# EAGLE board RedBot-Panel-v11 (EAGLE 6.4)
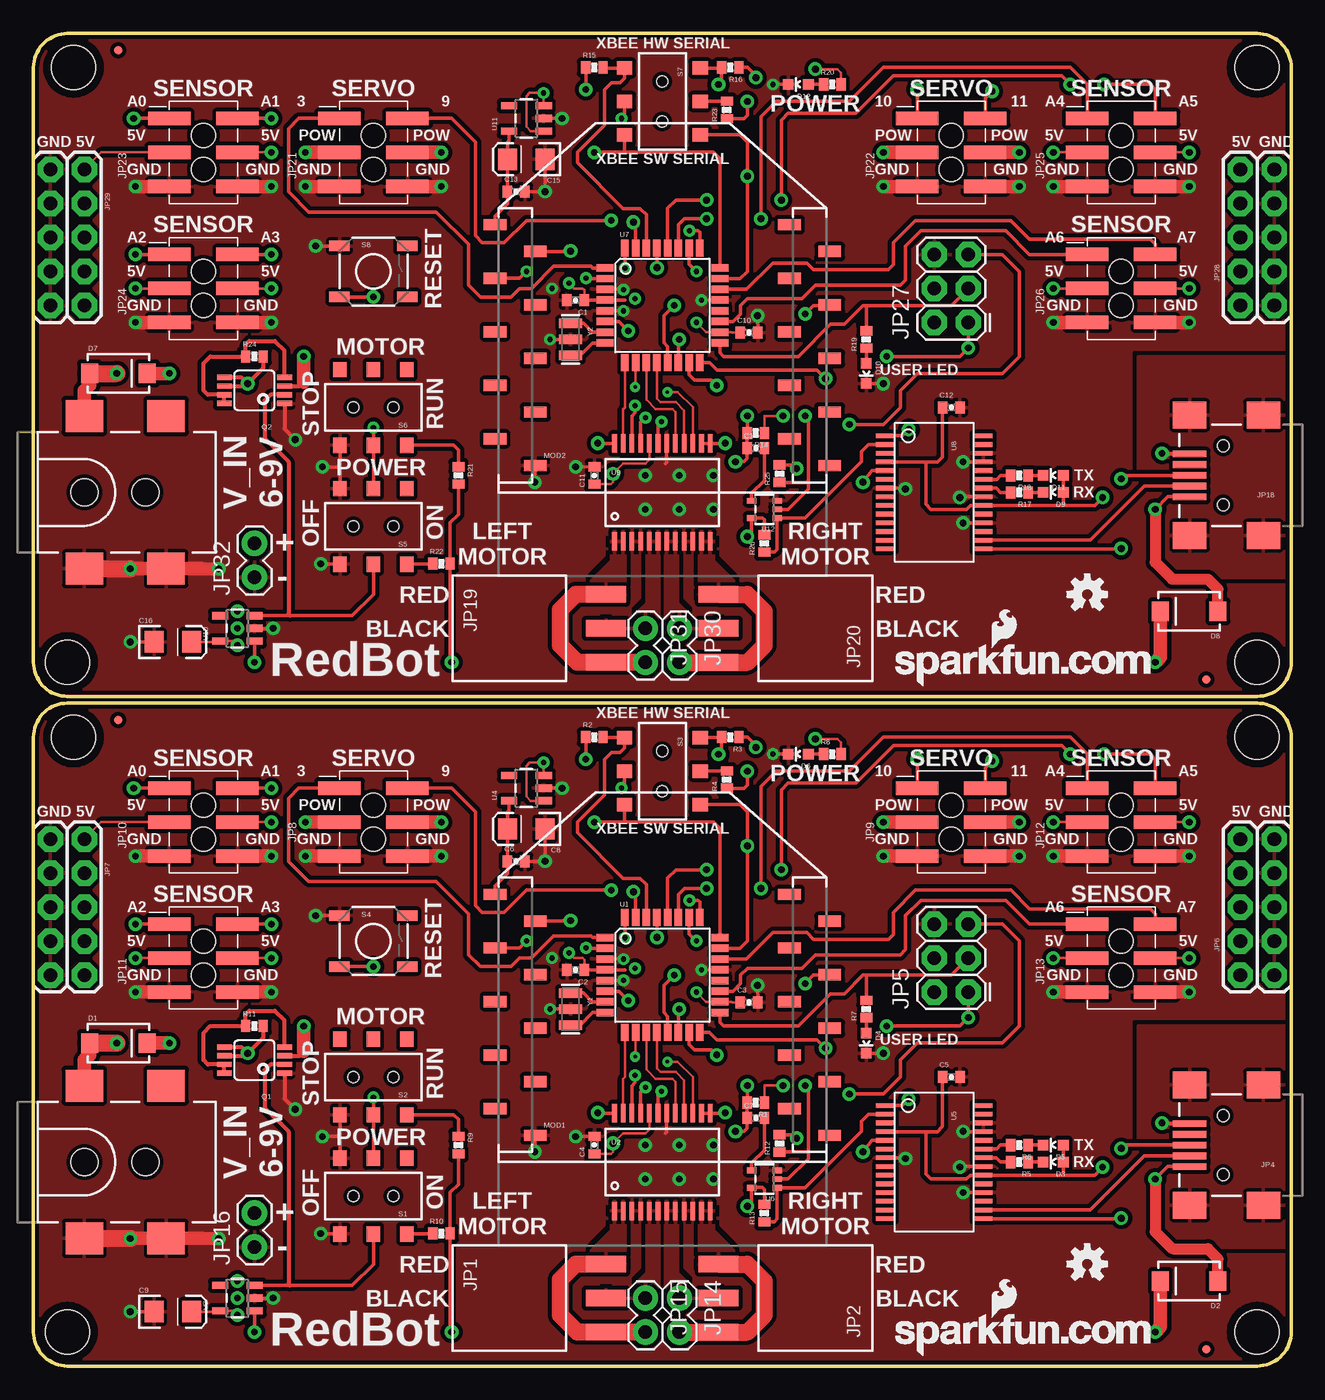
[diagram p0: board, top side]
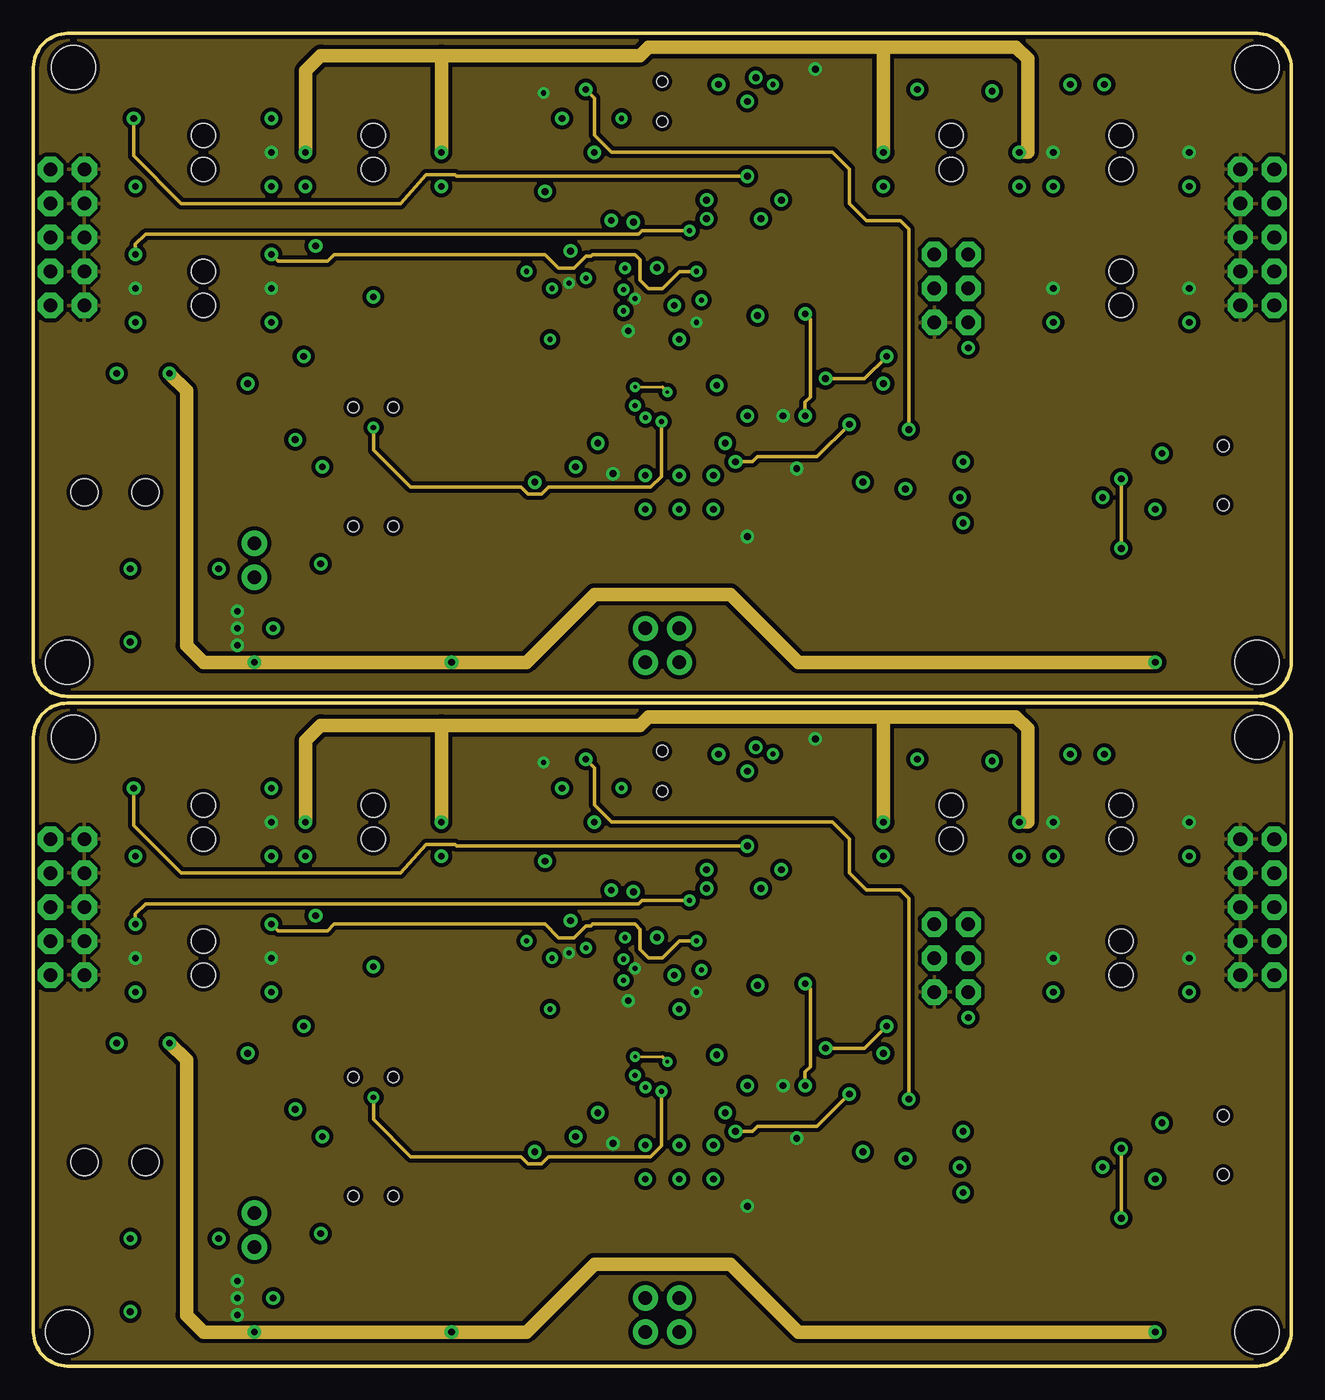
[diagram p1: board, inner layer 5V]
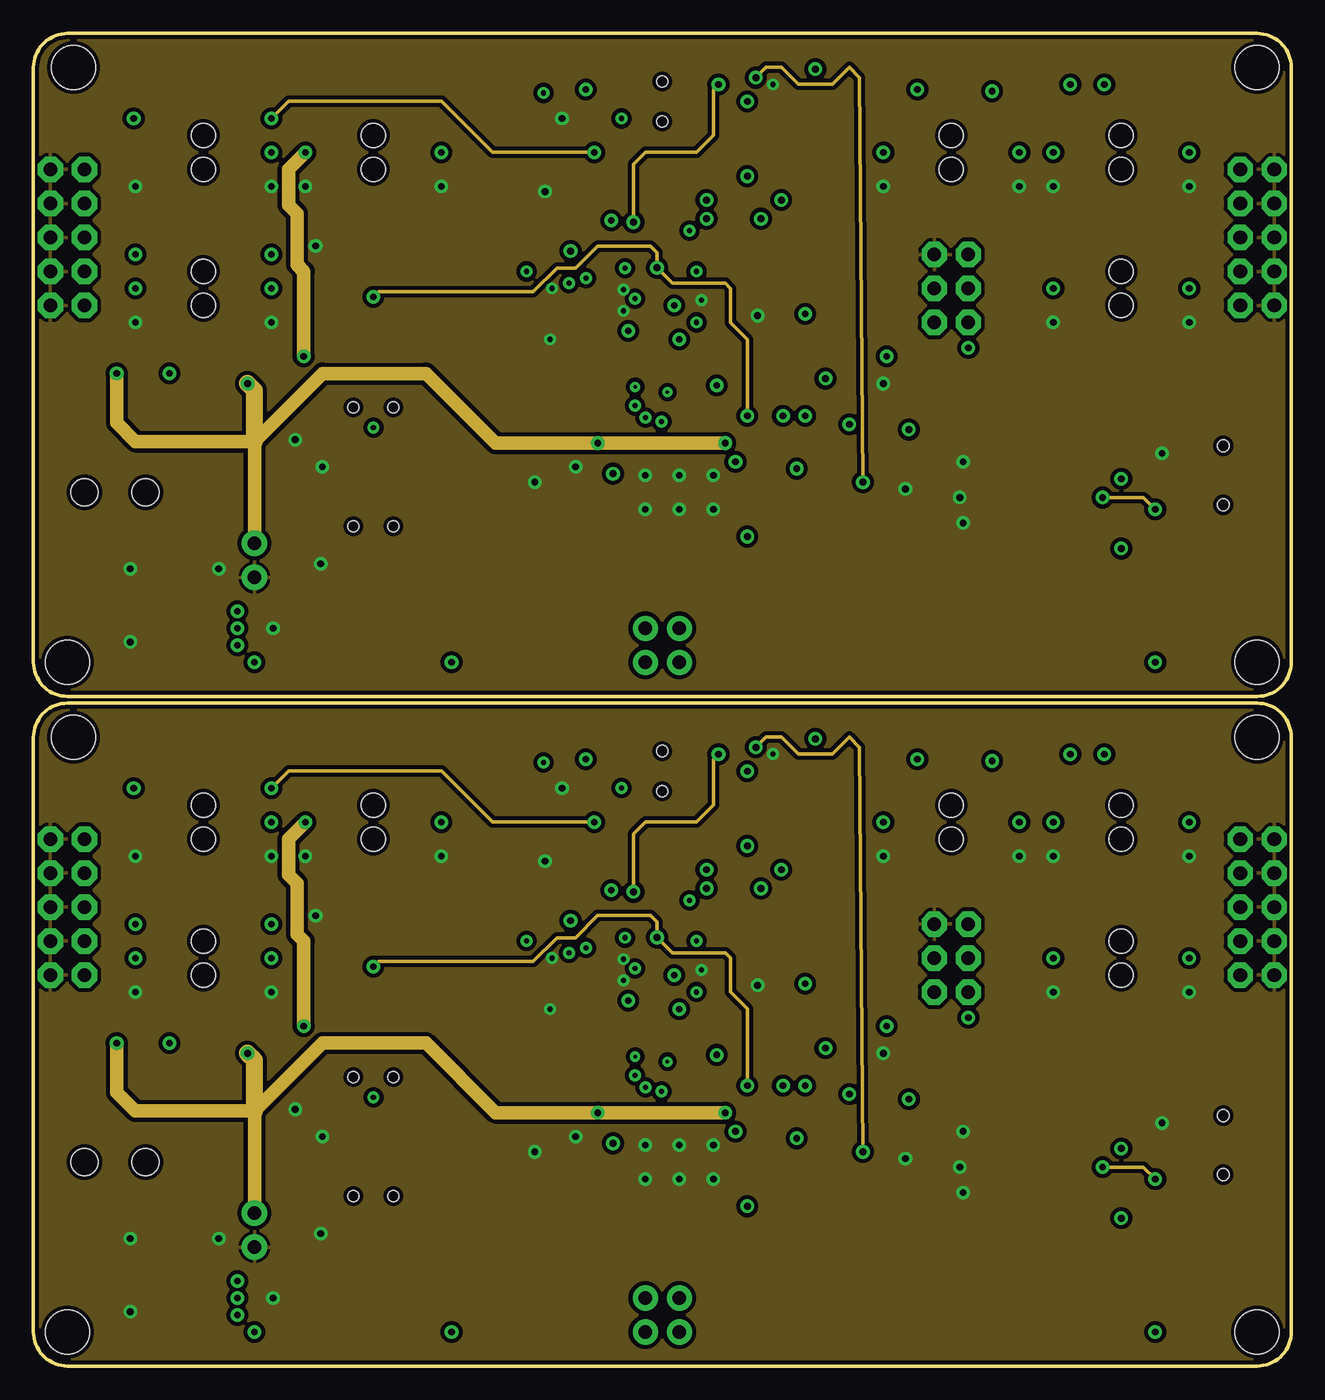
[diagram p2: board, inner layer Gnd]
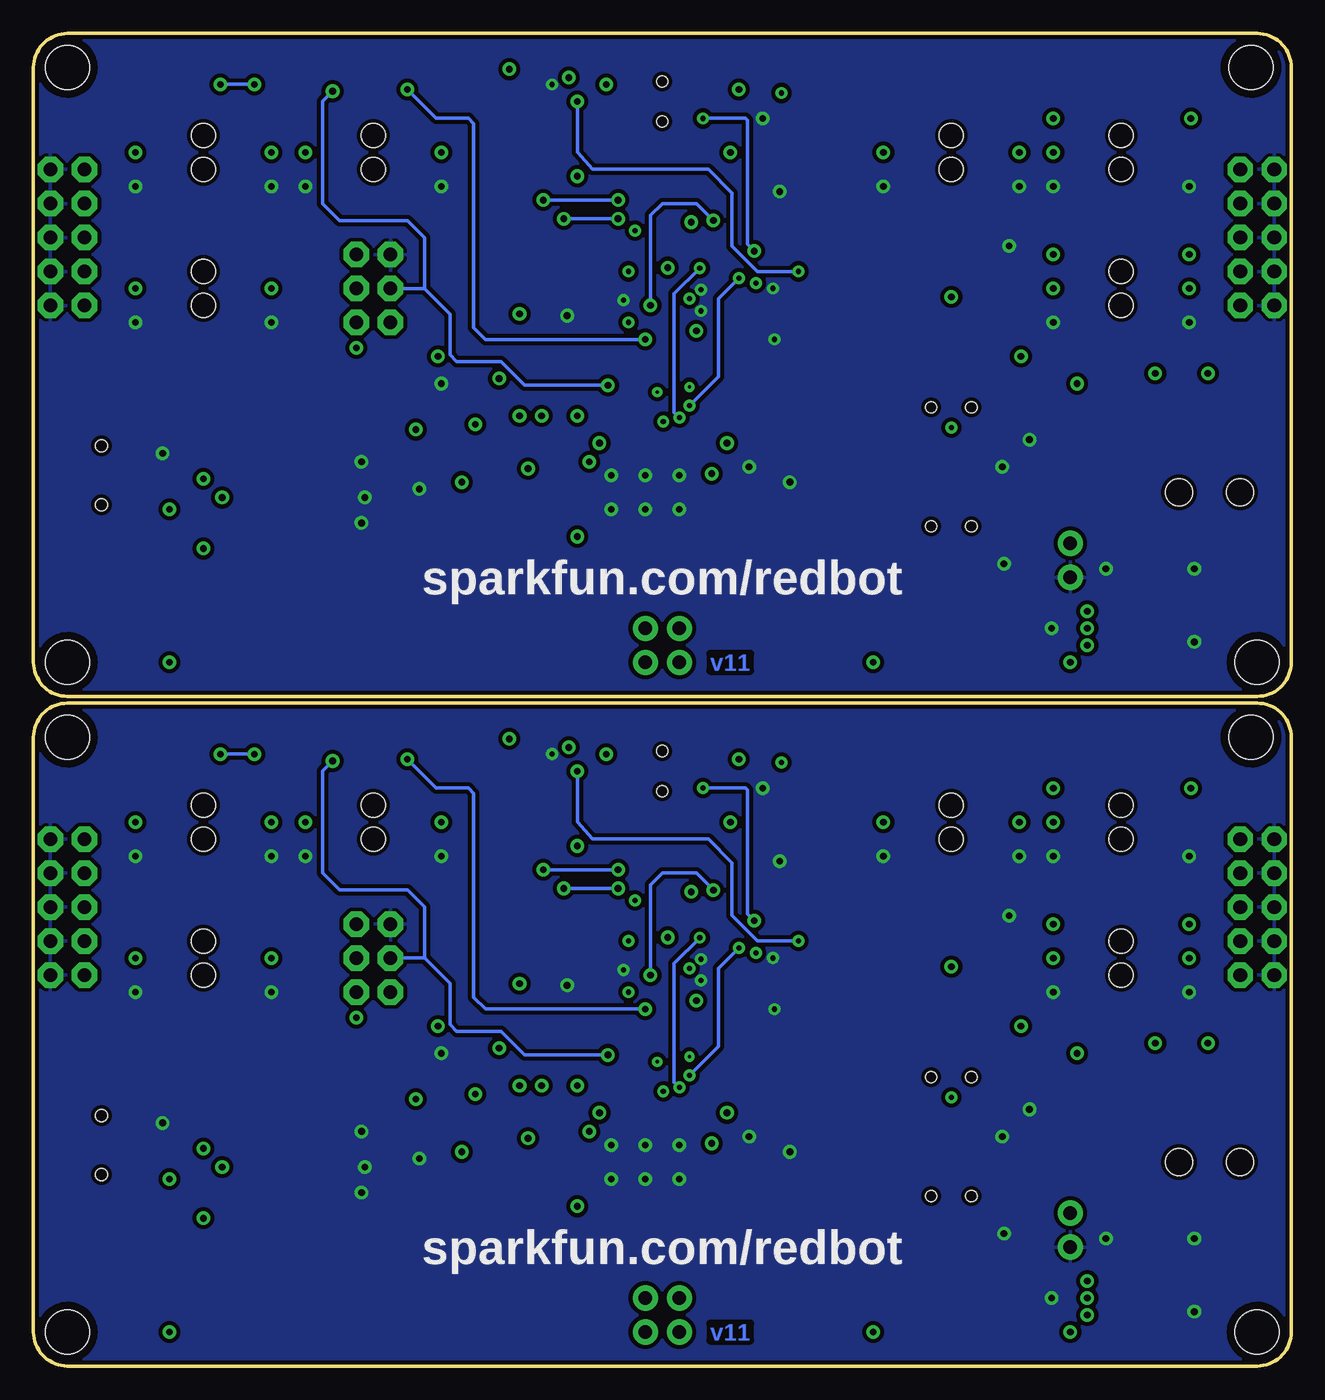
[diagram p3: board, bottom side, seen from below]

Size 93.98 x 99.57 mm. Coordinates in mm from the lower left corner, seen from the top.
Outline: 0,46.99 0,2.54 arc90 2.54,0 91.44,0 arc90 93.98,2.54 93.98,46.99 arc90 91.44,49.53 2.54,49.53 arc90 0,46.99
Outline: 0,97.03 0,52.58 arc90 2.54,50.04 91.44,50.04 arc90 93.98,52.58 93.98,97.03 arc90 91.44,99.57 2.54,99.57 arc90 0,97.03
Copper layers (1*16): Top 0.035mm / dielectric 1.5mm / Bottom 0.035mm
Design rules "Sparkfun": minimum track width 8mil, minimum drill 20mil, track to track 8mil, track to pad 8mil, pad to pad 8mil, via to via 8mil, smd to smd 8mil, copper to edge 8mil, drill to drill 8mil, minimum pad ring 12mil, minimum via ring 10mil, stop-mask expansion 4mil, vias tented up to drill 20mil, thermal gap 10mil

## Footprints (pad centres in the part's own frame; a part is rotated, then mirrored left to right if it is on the bottom)
0402-CAP = smd 0.7 x 0.9: 1 -0.65,0; 2 0.65,0
EIA3216 = smd 1.4 x 1.6: A 1.4,0; C -1.4,0
SMA-DIODE = smd 1.27 x 1.47: A -2.15,0; C 2.15,0
LED-0603 = smd 0.8 x 0.8: A 0,-0.75; C 0,0.75
MICRO-FIDUCIAL = smd 0.635 x 0.635: 1 0,0
1X03_SMD_RA_FEMALE = smd 1.25 x 3: 1 -2.54,7.225; 2 0,7.225; 3 2.54,7.225
POWER_JACK_SMD = smd 2.8 x 2.4: GND 0,-5.7; P$4 6.1,-5.7; VIN0 0,5.7; VIN1 6.1,5.7 | hole 2.032: 0,0; 4.572,0
USB-MINIB = smd 2.5 x 0.5: D+ 2.5,0; D- 2.5,0.8; GND 2.5,-1.6; ID 2.5,-0.8; VBUS 2.5,1.6 | smd 2.5 x 2: MTN1 -3,4.5; MTN2 2.5,4.5; MTN3 -3,-4.5; MTN4 2.5,-4.5 | hole 0.9: 0,2.2; 0,-2.2
2X3 = drill 1.016 pad 1.88 octagon: 1 0,0; 2 0,2.54; 3 2.54,0; 4 2.54,2.54; 5 5.08,0; 6 5.08,2.54
2X5_NOSILK = drill 1.016 pad 1.88 octagon: 1 -1.27,5.08; 2 1.27,5.08; 3 -1.27,2.54; 4 1.27,2.54; 5 -1.27,0; 6 1.27,0; 7 -1.27,-2.54; 8 1.27,-2.54; 9 -1.27,-5.08; 10 1.27,-5.08
2X3_SMT_POSTS = smd 1 x 3.17: 1 -2.54,-2.54; 2 -2.54,2.54; 3 0,-2.54; 4 0,2.54; 5 2.54,-2.54; 6 2.54,2.54 | hole 1.8: -1.27,0; 1.27,0
1X02 = drill 1.016 pad 1.88: 1 0,0; 2 2.54,0
XBEE-SMD = smd 1.7 x 0.85: 1 -12.5,20; 2 -9.5,18; 3 -12.5,16; 4 -9.5,14; 5 -12.5,12; 6 -9.5,10; 7 -12.5,8; 8 -9.5,6; 9 -12.5,4; 10 -9.5,2; 11 12.5,2; 12 9.5,4; 13 12.5,6; 14 9.5,8; 15 12.5,10; 16 9.5,12; 17 12.5,14; 18 9.5,16; 19 12.5,18; 20 9.5,20
MSOP8 = smd 0.4 x 1.1: 1 -0.975,-2.25; 2 -0.325,-2.25; 3 0.325,-2.25; 4 0.975,-2.25; 5 0.975,2.25; 6 0.325,2.25; 7 -0.325,2.25; 8 -0.975,2.25
0402-RES = smd 0.7 x 0.9: 1 -0.65,0; 2 0.65,0
AYZ0202 = smd 1 x 1.15: 1 -2.5,2.825; 2 0,2.825; 3 2.5,2.825; 4 -2.5,-2.825; 5 0,-2.825; 6 2.5,-2.825 | hole 0.85: 1.5,0; -1.5,0
TACTILE_SWITCH_SMD = smd 1.524 x 0.762: 1 -2.54,1.905; 2 2.54,1.905; 3 -2.54,-1.905; 4 2.54,-1.905
STAND-OFF = hole 3.302: 0,0
TQFP32-08 = smd 1.27 x 0.559: 1 -4.293,2.8; 2 -4.293,2; 3 -4.293,1.2; 4 -4.293,0.4; 5 -4.293,-0.4; 6 -4.293,-1.2; 7 -4.293,-2; 8 -4.293,-2.8; 17 4.293,-2.8; 18 4.293,-2; 19 4.293,-1.2; 20 4.293,-0.4; 21 4.293,0.4; 22 4.293,1.2; 23 4.293,2; 24 4.293,2.8 | smd 0.559 x 1.27: 9 -2.8,-4.293; 10 -2,-4.293; 11 -1.2,-4.293; 12 -0.4,-4.293; 13 0.4,-4.293; 14 1.2,-4.293; 15 2,-4.293; 16 2.8,-4.293; 25 2.8,4.293; 26 2,4.293; 27 1.2,4.293; 28 0.4,4.293; 29 -0.4,4.293; 30 -1.2,4.293; 31 -2,4.293; 32 -2.8,4.293
SSOP24 = smd 0.348 x 1.397: 1 -3.575,-3.656; 2 -2.925,-3.656; 3 -2.275,-3.656; 4 -1.625,-3.656; 5 -0.975,-3.656; 6 -0.325,-3.656; 7 0.325,-3.656; 8 0.975,-3.656; 9 1.625,-3.656; 10 2.275,-3.656; 11 2.925,-3.656; 12 3.575,-3.656; 13 3.575,3.656; 14 2.925,3.656; 15 2.275,3.656; 16 1.625,3.656; 17 0.975,3.656; 18 0.325,3.656; 19 -0.325,3.656; 20 -0.975,3.656; 21 -1.625,3.656; 22 -2.275,3.656; 23 -2.925,3.656; 24 -3.575,3.656
SOT23-5 = smd 0.55 x 1.2: 1 -0.95,-1.3; 2 0,-1.3; 3 0.95,-1.3; 4 0.95,1.3; 5 -0.95,1.3
SSOP28DB = smd 0.348 x 1.397: 1 -4.225,-3.656; 2 -3.575,-3.656; 3 -2.925,-3.656; 4 -2.275,-3.656; 5 -1.625,-3.656; 6 -0.975,-3.656; 7 -0.325,-3.656; 8 0.325,-3.656; 9 0.975,-3.656; 10 1.625,-3.656; 11 2.275,-3.656; 12 2.925,-3.656; 13 3.575,-3.656; 14 4.225,-3.656; 15 4.225,3.656; 16 3.575,3.656; 17 2.925,3.656; 18 2.275,3.656; 19 1.625,3.656; 20 0.975,3.656; 21 0.325,3.656; 22 -0.325,3.656; 23 -0.975,3.656; 24 -1.625,3.656; 25 -2.275,3.656; 26 -2.925,3.656; 27 -3.575,3.656; 28 -4.225,3.656
SOT353 = smd 0.42 x 0.7: 1 -0.65,-0.95; 2 0,-0.95; 3 0.65,-0.95; 4 0.65,0.95; 5 -0.65,0.95
RESONATOR-SMD = smd 0.7 x 1.7: 1 -1.2,0; 2 0,0; 3 1.2,0

## Placement (x,y rotation side)
C1  0.1uF  [0402-CAP]  40.51,79.63 180 top
C2  0.1uF  [0402-CAP]  40.51,29.59 180 top
C3  0.1uF  [0402-CAP]  53.47,27.18 0 top
C4  0.1uF  [0402-CAP]  41.91,16.51 90 top
C5  0.1uF  [0402-CAP]  68.58,21.59 0 top
C6  0.1uF  [0402-CAP]  36.07,37.72 0 top
C7  0.1uF  [0402-CAP]  53.98,18.54 0 top
C8  10uF  [EIA3216]  36.83,40.13 180 top
C9  10uF  [EIA3216]  10.41,4.06 0 top
C10  0.1uF  [0402-CAP]  53.47,77.22 0 top
C11  0.1uF  [0402-CAP]  41.91,66.55 90 top
C12  0.1uF  [0402-CAP]  68.58,71.63 0 top
C13  0.1uF  [0402-CAP]  36.07,87.76 0 top
C14  0.1uF  [0402-CAP]  53.98,68.58 0 top
C15  10uF  [EIA3216]  36.83,90.17 180 top
C16  10uF  [EIA3216]  10.41,54.1 0 top
D1  [SMA-DIODE]  6.35,24.13 0 top
D2  [SMA-DIODE]  86.36,6.35 180 top
D3  GREEN  [LED-0603]  76.2,15.24 90 top
D4  GREEN  [LED-0603]  62.23,24.13 180 top
D5  GREEN  [LED-0603]  76.2,16.51 90 top
D6  GREEN  [LED-0603]  57.15,45.72 90 top
D7  [SMA-DIODE]  6.35,74.17 0 top
D8  [SMA-DIODE]  86.36,56.39 180 top
D9  GREEN  [LED-0603]  76.2,65.28 90 top
D10  GREEN  [LED-0603]  62.23,74.17 180 top
D11  GREEN  [LED-0603]  76.2,66.55 90 top
D12  GREEN  [LED-0603]  57.15,95.76 90 top
FID1  FIDUCIALUFIDUCIAL  [MICRO-FIDUCIAL]  6.35,48.26 0 top
FID2  FIDUCIALUFIDUCIAL  [MICRO-FIDUCIAL]  87.63,1.27 0 top
FID3  FIDUCIALUFIDUCIAL  [MICRO-FIDUCIAL]  6.35,98.3 0 top
FID4  FIDUCIALUFIDUCIAL  [MICRO-FIDUCIAL]  87.63,51.31 0 top
JP1  1x3 RA Female .1"  [1X03_SMD_RA_FEMALE]  35.56,5.08 270 top
JP2  1x3 RA Female .1"  [1X03_SMD_RA_FEMALE]  58.42,5.08 90 top
JP3  5.5x2.1mm Barrel  [POWER_JACK_SMD]  3.81,15.24 0 top
JP4  USB-B  [USB-MINIB]  88.9,16.51 180 top
JP5  AVR_SPI_PRG_6PTH  [2X3]  69.85,27.94 90 top
JP6  M05X2NO_SILK  [2X5_NOSILK]  91.44,34.29 0 top
JP7  M05X2NO_SILK  [2X5_NOSILK]  2.54,34.29 180 top
JP8  [2X3_SMT_POSTS]  25.4,40.64 270 top
JP9  [2X3_SMT_POSTS]  68.58,40.64 270 top
JP10  [2X3_SMT_POSTS]  12.7,40.64 270 top
JP11  [2X3_SMT_POSTS]  12.7,30.48 270 top
JP12  [2X3_SMT_POSTS]  81.28,40.64 270 top
JP13  [2X3_SMT_POSTS]  81.28,30.48 270 top
JP14  [1X02]  48.26,5.08 270 top
JP15  [1X02]  45.72,5.08 270 top
JP16  [1X02]  16.51,8.89 90 top
JP17  5.5x2.1mm Barrel  [POWER_JACK_SMD]  3.81,65.28 0 top
JP18  USB-B  [USB-MINIB]  88.9,66.55 180 top
JP19  1x3 RA Female .1"  [1X03_SMD_RA_FEMALE]  35.56,55.12 270 top
JP20  1x3 RA Female .1"  [1X03_SMD_RA_FEMALE]  58.42,55.12 90 top
JP21  [2X3_SMT_POSTS]  25.4,90.68 270 top
JP22  [2X3_SMT_POSTS]  68.58,90.68 270 top
JP23  [2X3_SMT_POSTS]  12.7,90.68 270 top
JP24  [2X3_SMT_POSTS]  12.7,80.52 270 top
JP25  [2X3_SMT_POSTS]  81.28,90.68 270 top
JP26  [2X3_SMT_POSTS]  81.28,80.52 270 top
JP27  AVR_SPI_PRG_6PTH  [2X3]  69.85,77.98 90 top
JP28  M05X2NO_SILK  [2X5_NOSILK]  91.44,84.33 0 top
JP29  M05X2NO_SILK  [2X5_NOSILK]  2.54,84.33 180 top
JP30  [1X02]  48.26,55.12 270 top
JP31  [1X02]  45.72,55.12 270 top
JP32  [1X02]  16.51,58.93 90 top
MOD1  XBEE-1B3  [XBEE-SMD]  46.99,15.24 0 top
MOD2  XBEE-1B3  [XBEE-SMD]  46.99,65.28 0 top
Q1  [MSOP8]  16.51,22.86 90 top
Q2  [MSOP8]  16.51,72.9 90 top
R1  10k  [0402-RES]  53.98,19.68 180 top
R2  1k  [0402-RES]  41.91,46.99 0 top
R3  1k  [0402-RES]  52.07,46.99 180 top
R4  1k  [0402-RES]  51.82,43.81 90 top
R5  1k  [0402-RES]  73.66,15.24 180 top
R6  1k  [0402-RES]  73.66,16.51 180 top
R7  1k  [0402-RES]  62.23,26.67 90 top
R8  1k  [0402-RES]  59.69,45.72 0 top
R9  10k  [0402-RES]  31.75,16.51 270 top
R10  10k  [0402-RES]  30.48,9.91 0 top
R11  10k  [0402-RES]  16.51,25.4 0 top
R12  10k  [0402-RES]  55.75,16.64 90 top
R13  10k  [0402-RES]  54.61,11.43 90 top
R14  10k  [0402-RES]  53.98,69.72 180 top
R15  1k  [0402-RES]  41.91,97.03 0 top
R16  1k  [0402-RES]  52.07,97.03 180 top
R17  1k  [0402-RES]  73.66,65.28 180 top
R18  1k  [0402-RES]  73.66,66.55 180 top
R19  1k  [0402-RES]  62.23,76.71 90 top
R20  1k  [0402-RES]  59.69,95.76 0 top
R21  10k  [0402-RES]  31.75,66.55 270 top
R22  10k  [0402-RES]  30.48,59.94 0 top
R23  1k  [0402-RES]  51.82,93.85 90 top
R24  10k  [0402-RES]  16.51,75.44 0 top
R25  10k  [0402-RES]  55.75,66.67 90 top
R26  10k  [0402-RES]  54.61,61.47 90 top
S1  DPDT  [AYZ0202]  25.4,12.7 180 top
S2  DPDT  [AYZ0202]  25.4,21.59 180 top
S3  DPDT  [AYZ0202]  46.99,44.45 270 top
S4  [TACTILE_SWITCH_SMD]  25.4,31.75 0 top
S5  DPDT  [AYZ0202]  25.4,62.74 180 top
S6  DPDT  [AYZ0202]  25.4,71.63 180 top
S7  DPDT  [AYZ0202]  46.99,94.49 270 top
S8  [TACTILE_SWITCH_SMD]  25.4,81.79 0 top
SFE-LOGO1  LOGO-SFENEW  [SFE-NEW-WEBLOGO]  64.39,0.76 0 top
SFE-LOGO2  LOGO-SFENEW  [SFE-NEW-WEBLOGO]  64.39,50.8 0 top
STANDOFF1  STAND-OFF  [STAND-OFF]  91.44,2.54 0 top
STANDOFF2  STAND-OFF  [STAND-OFF]  2.99,46.99 0 top
STANDOFF3  STAND-OFF  [STAND-OFF]  2.54,2.54 0 top
STANDOFF4  STAND-OFF  [STAND-OFF]  91.44,46.99 0 top
STANDOFF5  STAND-OFF  [STAND-OFF]  91.44,52.58 0 top
STANDOFF6  STAND-OFF  [STAND-OFF]  2.99,97.03 0 top
STANDOFF7  STAND-OFF  [STAND-OFF]  2.54,52.58 0 top
STANDOFF8  STAND-OFF  [STAND-OFF]  91.44,97.03 0 top
U1  ATMEGA328P  [TQFP32-08]  46.99,29.21 0 top
U2  TB6612FNG  [SSOP24]  46.99,15.24 0 top
U3  MIC5219 5V  [SOT23-5]  15.24,5.08 90 top
U4  MIC5219 3.3V  [SOT23-5]  36.83,43.18 90 top
U5  FT232RLSSOP  [SSOP28DB]  67.31,15.24 270 top
U6  7408SE  [SOT353]  54.61,13.97 90 top
U7  ATMEGA328P  [TQFP32-08]  46.99,79.25 0 top
U8  FT232RLSSOP  [SSOP28DB]  67.31,65.28 270 top
U9  TB6612FNG  [SSOP24]  46.99,65.28 0 top
U10  MIC5219 5V  [SOT23-5]  15.24,55.12 90 top
U11  MIC5219 3.3V  [SOT23-5]  36.83,93.22 90 top
U12  7408SE  [SOT353]  54.61,64.01 90 top
U$1  OSHW-LOGOS  [OSHW-LOGO-S]  78.74,57.66 0 top
U$17  OSHW-LOGOS  [OSHW-LOGO-S]  78.74,7.62 0 top
U$21  FOUR_LAYER_WARNING  [FOUR_LAYER_WARNING]  0,-2.54 0 top
Y1  16MHz  [RESONATOR-SMD]  40.13,26.67 270 top
Y2  16MHz  [RESONATOR-SMD]  40.13,76.71 270 top

## Library data of the parts
C1-C7 C10-C14 = SparkFun-Capacitors; PROD_ID: CAP-00810
C8 C9 C15 C16 = SparkFun-Capacitors; PROD_ID: CAP-00811
D1 D2 D7 D8 = SparkFun-DiscreteSemi; PROD_ID: DIO-09886
D3-D6 D9-D12 = SparkFun-LED; PROD_ID: DIO-00821
FID1-FID4 SFE-LOGO1 SFE-LOGO2 U$1 U$17 U$21 = SparkFun-Aesthetics
JP1 JP2 JP19 JP20 = SparkFun-Connectors; PROD_ID: CONN-10926
JP3 JP17 = SparkFun-Connectors; PROD_ID: CONN-08106
JP4-JP7 JP14-JP16 JP18 JP27-JP32 = SparkFun-Connectors
JP8-JP13 JP21-JP26 = SparkFun-Connectors; PROD_ID: CONN-11415
MOD1 MOD2 = SparkFun-RF; PROD_ID: CONN-09042
Q1 Q2 = SparkFun-DiscreteSemi; PROD_ID: TRANS-07913
R1 R9-R14 R21 R22 R24-R26 = SparkFun-Resistors; PROD_ID: RES-00824
R2-R8 R15-R20 R23 = SparkFun-Resistors; PROD_ID: RES-07856
S1-S3 S5-S7 = SparkFun-Electromechanical; PROD_ID: SWCH-08179
S4 S8 = SparkFun-Electromechanical; PROD_ID: SWCH-08247
STANDOFF1-STANDOFF8 = SparkFun-Electromechanical
U1 U7 = SparkFun-DigitalIC; PROD_ID: IC-09069
U2 U9 = SparkFun-PowerIC; PROD_ID: IC-09363
U3 U10 = SparkFun-PowerIC; PROD_ID: VREG-10107
U4 U11 = SparkFun-PowerIC; PROD_ID: VREG-09872
U5 U8 = SparkFun-DigitalIC; PROD_ID: IC-00870
U6 U12 = SparkFun-DigitalIC; PROD_ID: IC-10841; VALUE: 74LVC1G08SE-7
Y1 Y2 = SparkFun-FreqCtrl; PROD_ID: XTAL-08900

## Nets
3.3V: C6.1 C8.A MOD1.1 U4.5
3.3V1: C13.1 C15.A MOD2.1 U11.5
5V: C2.1 C3.1 C4.1 C9.A JP5.2 JP6.1 JP6.3 JP6.5 JP6.7 JP6.9 JP7.1 JP7.3 JP7.5 JP7.7 JP7.9 JP10.3 JP10.4 JP11.3 JP11.4 JP12.3 JP12.4 JP13.3 JP13.4 R1.1 R8.2 R12.2 R13.2 U1.4 U1.6 U1.18 U2.20 U3.5 U4.1 U4.3 U6.5
5V1: C1.1 C10.1 C11.1 C16.A JP23.3 JP23.4 JP24.3 JP24.4 JP25.3 JP25.4 JP26.3 JP26.4 JP27.2 JP28.1 JP28.3 JP28.5 JP28.7 JP28.9 JP29.1 JP29.3 JP29.5 JP29.7 JP29.9 R14.1 R20.2 R25.2 R26.2 U7.4 U7.6 U7.18 U9.20 U10.5 U11.1 U11.3 U12.5
AREF: U1.20
AREF1: U7.20
FT232_RXI: R3.1 U5.5
FT232_RXI1: R16.1 U8.5
FT232_TXO: R2.1 U5.1
FT232_TXO1: R15.1 U8.1
FTDI_DTR: R13.1 U5.2 U6.1
FTDI_DTR1: R26.1 U8.2 U12.1
GND: C2.2 C3.2 C4.2 C5.2 C6.2 C8.C C9.C D4.C D6.C JP3.GND JP3.P$4 JP4.GND JP5.6 JP6.2 JP6.4 JP6.6 JP6.8 JP6.10 JP7.2 JP7.4 JP7.6 JP7.8 JP7.10 JP8.5 JP8.6 JP9.5 JP9.6 JP10.5 JP10.6 JP11.5 JP11.6 JP12.5 JP12.6 JP13.5 JP13.6 JP16.1 MOD1.10 Q1.1 S1.3 S1.6 S2.3 S4.1 U1.3 U1.5 U1.21 U2.3 U2.4 U2.9 U2.10 U2.18 U3.2 U4.2 U5.7 U5.18 U5.21 U5.25 U5.26 U6.3 Y1.2
GND1: C1.2 C10.2 C11.2 C12.2 C13.2 C15.C C16.C D10.C D12.C JP17.GND JP17.P$4 JP18.GND JP21.5 JP21.6 JP22.5 JP22.6 JP23.5 JP23.6 JP24.5 JP24.6 JP25.5 JP25.6 JP26.5 JP26.6 JP27.6 JP28.2 JP28.4 JP28.6 JP28.8 JP28.10 JP29.2 JP29.4 JP29.6 JP29.8 JP29.10 JP32.1 MOD2.10 Q2.1 S5.3 S5.6 S6.3 S8.1 U7.3 U7.5 U7.21 U8.7 U8.18 U8.21 U8.25 U8.26 U9.3 U9.4 U9.9 U9.10 U9.18 U10.2 U11.2 U12.3 Y2.2
L01: JP1.1 JP1.3 JP15.2 U2.1 U2.2
L02: JP1.2 JP15.1 U2.5 U2.6
L03: JP19.1 JP19.3 JP31.2 U9.1 U9.2
L04: JP19.2 JP31.1 U9.5 U9.6
L_CTRL_1: U1.32 U2.21
L_CTRL_2: U1.2 U2.22
L_CTRL_3: U7.2 U9.22
L_CTRL_4: U7.32 U9.21
MISO: JP5.1 U1.16
MISO1: JP27.1 U7.16
MOTOR_ENABLE: S1.5 S2.2 U2.19
MOTOR_ENABLE1: S5.5 S6.2 U9.19
N$1: R4.2 S3.2
N$2: Q1.4 Q1.7 Q1.8 R11.1
N$3: D5.C R6.1
N$4: D3.C R5.1
N$5: C7.2 U6.4
N$6: JP4.MTN1 JP4.MTN2 JP4.MTN3 JP4.MTN4
N$7: D4.A R7.1
N$8: D6.A R8.1
N$9: JP18.D- U8.16
N$10: JP18.D+ U8.15
N$11: U7.8 Y2.3
N$12: U7.7 Y2.1
N$13: D10.A R19.1
N$14: D12.A R20.1
N$15: R21.1 S6.1
N$16: C14.2 U12.4
N$17: R23.2 S7.2
N$18: R9.1 S2.1
N$19: JP18.MTN1 JP18.MTN2 JP18.MTN3 JP18.MTN4
N$20: Q2.4 Q2.7 Q2.8 R24.1
N$21: D11.C R18.1
N$22: D9.C R17.1
N$23: U1.8 Y1.3
N$24: U1.7 Y1.1
N$26: JP4.D- U5.16
N$27: JP4.D+ U5.15
PG_EN: R10.1 S1.1
PG_EN1: R22.1 S5.1
PROGRAM_ENABLE: Q1.2 S1.2 U3.3
PROGRAM_ENABLE1: Q2.2 S5.2 U10.3
PWML: U1.9 U2.23
PWML1: U7.9 U9.23
PWMR: U1.10 U2.15
PWMR1: U7.10 U9.15
R01: JP2.1 JP2.3 JP14.2 U2.11 U2.12
R02: JP2.2 JP14.1 U2.7 U2.8
R03: JP20.2 JP30.1 U9.7 U9.8
R04: JP20.1 JP20.3 JP30.2 U9.11 U9.12
R_CTRL_1: U1.11 U2.17
R_CTRL_2: U1.12 U2.16
R_CTRL_3: U7.11 U9.17
R_CTRL_4: U7.12 U9.16
RESET: C7.1 JP5.5 R1.2 S4.3 U1.29
RESET1: C14.1 JP27.5 R14.2 S8.3 U7.29
RXI: R2.2 S3.4 U1.30
RXI1: R15.2 S7.4 U7.30
RXLED: R5.2 U5.22
RXLED1: R17.2 U8.22
SCK: JP5.3 R7.2 U1.17
SCK1: JP27.3 R19.2 U7.17
SENSOR_0/SW_TXO: JP10.1 S3.3 U1.23
SENSOR_0/SW_TXO1: JP23.1 S7.3 U7.23
SENSOR_1: JP24.1 U7.25
SENSOR_1/SW_RXI: JP10.2 S3.6 U1.24
SENSOR_1/SW_RXI1: JP23.2 S7.6 U7.24
SENSOR_2: JP11.1 U1.25
SENSOR_3: JP11.2 U1.26
SENSOR_4: JP12.1 U1.27
SENSOR_5: JP12.2 U1.28
SENSOR_6: JP13.1 U1.19
SENSOR_7: JP13.2 U1.22
SENSOR_8: JP24.2 U7.26
SENSOR_9: JP25.1 U7.27
SENSOR_10: JP25.2 U7.28
SENSOR_11: JP26.1 U7.19
SENSOR_12: JP26.2 U7.22
SERVO_1: JP8.1 U1.1
SERVO_2: JP8.2 U1.13
SERVO_3: JP9.1 U1.14
SERVO_4: JP21.1 U7.1
SERVO_4/MOSI: JP5.4 JP9.2 U1.15
SERVO_4/MOSI1: JP22.2 JP27.4 U7.15
SERVO_5: JP21.2 U7.13
SERVO_6: JP22.1 U7.14
TXLED: R6.2 U5.23
TXLED1: R18.2 U8.23
TXO: R3.2 S3.1 U1.31
TXO1: R16.2 S7.1 U7.31
V_BATT: D1.A JP3.VIN0 JP16.2 Q1.5 Q1.6 R11.2 U2.13 U2.14 U2.24
V_BATT1: D7.A JP17.VIN0 JP32.2 Q2.5 Q2.6 R24.2 U9.13 U9.14 U9.24
V_GATED: JP8.3 JP8.4 JP9.3 JP9.4 Q1.3
V_GATED1: JP21.3 JP21.4 JP22.3 JP22.4 Q2.3
V_IN: D1.C D2.C R9.2 R10.2 U3.1
V_IN1: D7.C D8.C R21.2 R22.2 U10.1
V_USB: C5.1 D2.A D3.A D5.A JP4.VBUS U5.4 U5.20
V_USB1: C12.1 D8.A D9.A D11.A JP18.VBUS U8.4 U8.20
XBEE_DIO1: MOD2.17 R25.1 U12.2
XBEE_DIO3: MOD1.17 R12.1 U6.2
XBEE_RXI: MOD1.3 R4.1
XBEE_RXI1: MOD2.3 R23.1
XBEE_TXO: MOD1.2 S3.5
XBEE_TXO1: MOD2.2 S7.5

## Tracks (layer width: path | path; a pad name or v marks a point on that pad's centre or on a via)
3.3V
  Top 0.254: U4.5 35.53,41.5 35.43,41.4 C8.A 35.42,40.12 C6.1 35.42,36.81 34.49,35.89 MOD1.1
3.3V1
  Top 0.254: U11.5 35.53,91.54 35.43,91.44 C15.A 35.42,90.16 C13.1 35.42,86.85 34.49,85.92 MOD2.1
5V  (via drill 0.38, 0.51)
  Top 0.203: C2.1 41.16,30.34 41.02,30.48 40.39,30.48 v40.01,30.86 | U4.3 38.13,45.05 v38.1,45.09 37.08,45.09 36.83,44.83 36.83,42.55 37.15,42.23 U4.1 | R8.2 60.34,46.59 60.07,46.86 v58.42,46.86 | JP12.3 v76.2,40.64 | JP12.4 v86.36,40.64 | JP13.3 v76.2,30.48 | JP13.4 v86.36,30.48 | U2.20 46.02,17.69 45.72,17.4 44.07,17.4 v43.31,16.64 43.31,16 43.16,15.86 C4.1 | JP10.3 5.08,40.64 JP7.9 | v17.78,40.64 JP10.4 | JP11.3 v7.62,30.48 | JP11.4 v17.78,30.48 | C9.A 13.87,4.06 U3.5 14.92,4.13 v15.24,3.81 | v49.53,27.94 50.26,27.21 U1.18 52.16,27.21 52.2,27.18 C3.1 | v56.01,20.95 54.62,20.95 R1.1
  Top 0.254: C2.1 42.68,29.59 U1.4 44.19,29.61 | U1.6 43.74,28.01 v44.45,27.3 | v53.34,11.94 53.66,12.26 U6.5 53.67,13.34 54.48,13.34 54.61,13.21 R13.2 | R12.2 56.75,17.29 v57.02,17.02
  other vias: 15.24,5.08 15.24,6.35 44.96,29.72
  pour 5V (isolate 0.305): 2.54,49.53 91.44,49.53 arc-90 93.98,46.99 93.98,2.54 arc-90 91.44,0 2.54,0 arc-90 0,2.54 0,46.99 arc-90
5V1  (via drill 0.38, 0.51)
  Top 0.203: C1.1 41.16,80.38 41.02,80.52 40.39,80.52 v40.01,80.9 | U11.3 38.13,95.09 v38.1,95.12 37.08,95.12 36.83,94.87 36.83,92.58 37.15,92.27 U11.1 | R20.2 60.34,96.63 60.07,96.9 v58.42,96.9 | JP25.3 v76.2,90.68 | JP25.4 v86.36,90.68 | JP26.3 v76.2,80.52 | JP26.4 v86.36,80.52 | U9.20 46.02,67.73 45.72,67.44 44.07,67.44 v43.31,66.67 43.31,66.04 43.16,65.9 C11.1 | JP23.3 5.08,90.68 JP29.9 | v17.78,90.68 JP23.4 | JP24.3 v7.62,80.52 | JP24.4 v17.78,80.52 | C16.A 13.87,54.1 U10.5 14.92,54.17 v15.24,53.85 | v49.53,77.98 50.26,77.25 U7.18 52.16,77.25 52.2,77.22 C10.1 | v56.01,70.99 54.62,70.99 R14.1
  Top 0.254: C1.1 42.68,79.63 U7.4 44.19,79.65 | U7.6 43.74,78.05 v44.45,77.34 | v53.34,61.98 53.66,62.3 U12.5 53.67,63.37 54.48,63.37 54.61,63.25 R26.2 | R25.2 56.75,67.33 v57.02,67.06
  other vias: 15.24,55.12 15.24,56.39 44.96,79.76
  pour 5V (isolate 0.305): 2.54,99.57 91.44,99.57 arc-90 93.98,97.03 93.98,52.58 arc-90 91.44,50.04 2.54,50.04 arc-90 0,52.58 0,97.03 arc-90
FT232_RXI  (via drill 0.51)
  Top 0.254: U5.5 62.64,16.86 v61.98,16 | v53.98,46.23 53.98,46.35 53.34,46.99 R3.1
  Gnd 0.254: v61.98,16 61.72,46.23 60.96,46.99 59.69,45.72 57.15,45.72 55.88,46.99 54.74,46.99 v53.98,46.23
FT232_RXI1  (via drill 0.51)
  Top 0.254: U8.5 62.64,66.9 v61.98,66.04 | v53.98,96.27 53.98,96.39 53.34,97.03 R16.1
  Gnd 0.254: v61.98,66.04 61.72,96.27 60.96,97.03 59.69,95.76 57.15,95.76 55.88,97.03 54.74,97.03 v53.98,96.27
FT232_TXO  (via drill 0.51)
  Top 0.254: U5.1 64.93,19.46 v65.41,19.94 | v41.27,45.34 41.27,46.98 R2.1
  5V 0.254: v65.41,19.94 65.41,34.92 64.77,35.56 62.23,35.56 60.96,36.83 60.96,39.37 59.69,40.64 43.18,40.64 41.91,41.91 41.91,44.7 v41.27,45.34
FT232_TXO1  (via drill 0.51)
  Top 0.254: U8.1 64.93,69.5 v65.41,69.98 | v41.27,95.38 41.27,97.01 R15.1
  5V 0.254: v65.41,69.98 65.41,84.96 64.77,85.6 62.23,85.6 60.96,86.87 60.96,89.41 59.69,90.68 43.18,90.68 41.91,91.95 41.91,94.74 v41.27,95.38
FTDI_DTR
  Top 0.254: U5.2 62.38,18.82 61.85,18.29 61.85,17.53 57.64,13.32 U6.1 55.56,10.98 55.37,10.79 54.62,10.79 R13.1
FTDI_DTR1
  Top 0.254: U8.2 62.38,68.85 61.85,68.33 61.85,67.56 57.64,63.36 U12.1 55.56,61.02 55.37,60.83 54.62,60.83 R26.1
GND  (via drill 0.38, 0.51)
  Top 0.254: 36.83,38.1 36.72,37.99 C6.2 v38.23,37.72 C8.C | U4.2 v39.5,43.18 | S1.3 21.62,9.88 v21.46,9.91 | C9.C v7.24,4.06 | U2.18 47.31,17.47 47.24,17.4 | C4.2 v40.51,17.14 | MOD1.10 37.49,16.28 v37.47,16 | Y1.2 v38.61,26.67 | U1.5 v44.09,28.81 v44.1,28.8 | U1.21 49.96,29.61 v49.9,29.6 | U5.21 69.53,14.91 v69.22,14.86 | U5.7 64.95,15.56 v65.15,15.49 | U5.25 69.48,17.52 v69.47,17.53 | U5.18 69.48,12.96 v69.47,12.95 | D4.C 63.49,23.38 v63.5,23.37 | C3.2 v54.1,28.45 | S4.1 v21.08,33.66 | U1.3 v44.09,30.41 v44.1,30.4 | D6.C v55.24,45.72 | S1.6 22.9,17.27 | 22.9,17.27 S2.3 | v21.59,17.14 22.77,17.14 22.9,17.27
  Top 0.305: JP4.GND 84.38,18.11 v84.33,18.16 | U3.2 v17.91,5.08 | Q1.1 18.76,19.98 v19.56,19.18
  Top 1.016: JP9.6 v73.66,38.1 | JP8.5 v20.32,38.1 | JP8.6 v30.48,38.1 | v7.24,9.53 7.25,9.54 JP3.P$4 12.56,9.54 v13.84,9.53 | JP10.6 v17.78,38.1 | JP10.5 v7.62,38.1 | JP11.6 v17.78,27.94 | JP11.5 v7.62,27.94 | JP12.6 v86.36,38.1 | JP13.6 v86.36,27.94 | JP13.5 v76.2,27.94 | JP12.5 v76.2,38.1 | JP9.5 v63.5,38.1
  Top 1.27: v7.24,9.53 3.83,9.53 JP3.GND
  other vias: 45.72,16.51 48.26,16.51 50.8,16.51 50.8,13.97 48.26,13.97 45.72,13.97 38.73,30.48
  pour Gnd (isolate 0.305): 2.54,49.53 91.44,49.53 arc-90 93.98,46.99 93.98,2.54 arc-90 91.44,0 2.54,0 arc-90 0,2.54 0,46.99 arc-90
  pour Bottom (isolate 0.305): 2.54,49.53 91.44,49.53 arc-90 93.98,46.99 93.98,2.54 arc-90 91.44,0 2.54,0 arc-90 0,2.54 0,46.99 arc-90
  pour Top (isolate 0.305): 44.58,10.92 49.4,10.92 49.4,12.57 49.53,12.7 51.18,12.7 51.18,17.78 47.24,17.78 46.48,17.02 44.58,17.02
  pour Top (isolate 0.305, rank 2): 2.54,49.53 91.44,49.53 arc-90 93.98,46.99 93.98,2.54 arc-90 91.44,0 2.54,0 arc-90 0,2.54 0,46.99 arc-90
GND1  (via drill 0.38, 0.51)
  Top 0.254: 36.83,88.14 36.72,88.03 C13.2 v38.23,87.76 C15.C | U11.2 v39.5,93.22 | S5.3 21.62,59.91 v21.46,59.94 | C16.C v7.24,54.1 | U9.18 47.31,67.51 47.24,67.44 | C11.2 v40.51,67.18 | MOD2.10 37.49,66.32 v37.47,66.04 | Y2.2 v38.61,76.71 | U7.5 v44.09,78.85 v44.1,78.84 | U7.21 49.96,79.65 v49.9,79.64 | U8.21 69.53,64.95 v69.22,64.9 | U8.7 64.95,65.6 v65.15,65.53 | U8.25 v69.48,67.55 v69.47,67.56 | U8.18 69.48,63 v69.47,62.99 | D10.C 63.49,73.42 v63.5,73.41 | C10.2 v54.1,78.49 | S8.1 v21.08,83.69 | U7.3 v44.09,80.45 v44.1,80.44 | D12.C v55.24,95.76 | S5.6 22.9,67.31 | 22.9,67.31 S6.3 | v21.59,67.18 22.77,67.18 22.9,67.31
  Top 0.305: JP18.GND 84.38,68.15 v84.33,68.2 | U10.2 v17.91,55.12 | Q2.1 18.76,70.01 v19.56,69.22
  Top 1.016: JP22.6 v73.66,88.14 | JP21.5 v20.32,88.14 | JP21.6 v30.48,88.14 | v7.24,59.56 7.25,59.58 JP17.P$4 12.56,59.58 v13.84,59.56 | JP23.6 v17.78,88.14 | JP23.5 v7.62,88.14 | JP24.6 v17.78,77.98 | JP24.5 v7.62,77.98 | JP25.6 v86.36,88.14 | JP26.6 v86.36,77.98 | JP26.5 v76.2,77.98 | JP25.5 v76.2,88.14 | JP22.5 v63.5,88.14
  Top 1.27: v7.24,59.56 3.83,59.56 JP17.GND
  other vias: 45.72,66.55 48.26,66.55 50.8,66.55 50.8,64.01 48.26,64.01 45.72,64.01 38.73,80.52
  pour Gnd (isolate 0.305): 2.54,99.57 91.44,99.57 arc-90 93.98,97.03 93.98,52.58 arc-90 91.44,50.04 2.54,50.04 arc-90 0,52.58 0,97.03 arc-90
  pour Bottom (isolate 0.305): 2.54,99.57 91.44,99.57 arc-90 93.98,97.03 93.98,52.58 arc-90 91.44,50.04 2.54,50.04 arc-90 0,52.58 0,97.03 arc-90
  pour Top (isolate 0.305): 44.58,60.96 49.4,60.96 49.4,62.61 49.53,62.74 51.18,62.74 51.18,67.82 47.24,67.82 46.48,67.06 44.58,67.06
  pour Top (isolate 0.305, rank 2): 2.54,99.57 91.44,99.57 arc-90 93.98,97.03 93.98,52.58 arc-90 91.44,50.04 2.54,50.04 arc-90 0,52.58 0,97.03 arc-90
L01
  Top 1.27: JP1.1 40.51,7.62 39.37,6.48 39.37,3.81 40.64,2.54 JP1.3 JP15.2
  pour Top (isolate 0.305): 43.18,12.32 44.2,12.32 44.2,7.11 41.4,7.11 41.4,8.26 41.27,8.26 43.18,10.16
L02
  pour Top (isolate 0.305): 45.85,12.32 46.74,12.32 46.74,5.59 45.72,4.57 41.4,4.57 41.4,5.71 44.58,5.71 45.85,6.99
L03
  Top 1.27: JP19.1 40.51,57.66 39.37,56.52 39.37,53.85 40.64,52.58 JP19.3 JP31.2
  pour Top (isolate 0.305): 43.18,62.36 44.2,62.36 44.2,57.15 41.4,57.15 41.4,58.29 41.27,58.29 43.18,60.2
L04
  pour Top (isolate 0.305): 45.85,62.36 46.74,62.36 46.74,55.63 45.72,54.61 41.4,54.61 41.4,55.75 44.58,55.75 45.85,57.02
L_CTRL_1  (via drill 0.38)
  Top 0.254: U2.21 45.37,20.47 v45.72,20.83 | v44.2,32 U1.32
  Bottom 0.254: v45.72,20.83 46.1,21.21 46.1,30.1 v44.2,32
L_CTRL_2  (via drill 0.38)
  Top 0.254: U1.2 41.31,31.21 v41.27,31.24 | U2.22 44.72,20.94 44.96,21.19 v44.96,21.72
  Bottom 0.254: v41.27,31.24 42.8,29.72 42.8,23.88 v44.96,21.72
L_CTRL_3  (via drill 0.38)
  Top 0.254: U7.2 41.31,81.25 v41.27,81.28 | U9.22 44.72,70.98 44.96,71.22 v44.96,71.75
  Bottom 0.254: v41.27,81.28 42.8,79.76 42.8,73.91 v44.96,71.75
L_CTRL_4  (via drill 0.38)
  Top 0.254: U9.21 45.37,70.51 v45.72,70.87 | v44.2,82.04 U7.32
  Bottom 0.254: v45.72,70.87 46.1,71.25 46.1,80.14 v44.2,82.04
MISO  (via drill 0.51)
  Top 0.254: U1.16 50.52,24.92 51.05,24.38 58.55,24.38 v59.18,23.75 | v63.75,25.4 69.22,25.4 v69.85,26.04 JP5.1
  5V 0.254: v59.18,23.75 62.1,23.75 v63.75,25.4
MISO1  (via drill 0.51)
  Top 0.254: U7.16 50.52,74.95 51.05,74.42 58.55,74.42 v59.18,73.79 | v63.75,75.44 69.22,75.44 v69.85,76.07 JP27.1
  5V 0.254: v59.18,73.79 62.1,73.79 v63.75,75.44
MOTOR_ENABLE  (via drill 0.38)
  Top 0.254: S2.2 v25.4,20.07 S1.5 | U2.19 46.66,20.26 v46.92,20.52
  5V 0.254: v46.92,20.52 46.92,16.44 46.1,15.62 38.48,15.62 37.97,15.11 36.96,15.11 36.45,15.62 28.19,15.62 25.4,18.41 v25.4,20.07
MOTOR_ENABLE1  (via drill 0.38)
  Top 0.254: S6.2 v25.4,70.1 S5.5 | U9.19 46.66,70.3 v46.92,70.56
  5V 0.254: v46.92,70.56 46.92,66.48 46.1,65.66 38.48,65.66 37.97,65.15 36.96,65.15 36.45,65.66 28.19,65.66 25.4,68.45 v25.4,70.1
N$1
  Top 0.254: S3.2 51.8,44.45 R4.2
N$2
  Top 0.305: Q1.8 Q1.7 13.03,22.54 12.7,22.86 12.7,24.89 13.21,25.4 R11.1 15.86,26.27 16.13,26.54 18.03,26.54 18.76,25.82 Q1.4
N$3
  Top 0.254: R6.1 D5.C
N$4
  Top 0.254: R5.1 D3.C
N$5
  Top 0.254: C7.2 54.61,16.13 53.66,15.18 U6.4
N$6
  pour Top (isolate 0.305): 93.98,25.4 82.55,25.4 82.55,8.89 93.98,8.89
N$7
  Top 0.254: D4.A R7.1
N$8
  Top 0.254: D6.A R8.1
N$9
  Top 0.254: U8.16 78.97,61.7 83.02,65.75 JP18.D-
N$10  (via drill 0.51)
  Top 0.254: U8.15 81.25,61.05 v81.28,61.09 | JP18.D+ 81.53,66.55 v81.28,66.29
  5V 0.254: v81.28,61.09 v81.28,66.29
N$11
  Top 0.254: U7.8 41.78,76.45 40.84,75.51 Y2.3
N$12
  Top 0.254: U7.7 41.75,77.25 41.09,77.91 Y2.1
N$13
  Top 0.254: D10.A R19.1
N$14
  Top 0.254: D12.A R20.1
N$15
  Top 0.254: S6.1 31.4,68.8 31.75,68.45 R21.1
N$16
  Top 0.254: C14.2 54.61,66.17 53.66,65.22 U12.4
N$17
  Top 0.254: S7.2 51.8,94.49 R23.2
N$18
  Top 0.254: S2.1 31.4,18.77 31.75,18.41 R9.1
N$19
  pour Top (isolate 0.305): 93.98,75.44 82.55,75.44 82.55,58.93 93.98,58.93
N$20
  Top 0.305: Q2.8 Q2.7 13.03,72.57 12.7,72.9 12.7,74.93 13.21,75.44 R24.1 15.86,76.31 16.13,76.58 18.03,76.58 18.76,75.86 Q2.4
N$21
  Top 0.254: R18.1 D11.C
N$22
  Top 0.254: R17.1 D9.C
N$23
  Top 0.254: U1.8 41.78,26.41 40.84,25.47 Y1.3
N$24
  Top 0.254: U1.7 41.75,27.21 41.09,27.87 Y1.1
N$26
  Top 0.254: U5.16 78.97,11.66 83.02,15.71 JP4.D-
N$27  (via drill 0.51)
  Top 0.254: U5.15 81.25,11.02 v81.28,11.05 | JP4.D+ 81.53,16.51 v81.28,16.26
  5V 0.254: v81.28,11.05 v81.28,16.26
PG_EN
  Top 0.254: S1.1 29.8,9.88 R10.1
PG_EN1
  Top 0.254: S5.1 29.8,59.91 R22.1
PROGRAM_ENABLE
  Top 0.254: U3.3 19.18,6.03 23.81,6.03 25.4,7.62 S1.2
  Top 0.305: Q1.2 17.71,22.54 17.27,22.1 17.27,19.3 19.05,17.53 19.05,6.16 19.18,6.03
PROGRAM_ENABLE1
  Top 0.254: U10.3 19.18,56.07 23.81,56.07 25.4,57.66 S5.2
  Top 0.305: Q2.2 17.71,72.57 17.27,72.14 17.27,69.34 19.05,67.56 19.05,56.2 19.18,56.07
PWML
  Top 0.203: U1.9 44.19,21.6 44.2,21.59 44.06,21.46 U2.23
PWML1
  Top 0.203: U7.9 44.19,71.63 44.2,71.63 44.06,71.5 U9.23
PWMR  (via drill 0.25)
  Top 0.203: U1.10 44.99,23.15 v44.96,23.11 | v47.37,22.73 48.13,22.73 49.27,21.6 U2.15
  5V 0.203: v44.96,23.11 46.99,23.11
  5V 0.254: 46.99,23.11 v47.37,22.73
PWMR1  (via drill 0.25)
  Top 0.203: U7.10 44.99,73.18 v44.96,73.15 | v47.37,72.77 48.13,72.77 49.27,71.64 U9.15
  5V 0.203: v44.96,73.15 46.99,73.15
  5V 0.254: 46.99,73.15 v47.37,72.77
R01
  Top 1.27: JP14.2 JP2.1 53.34,2.54 54.61,3.81 54.61,6.35 53.34,7.62 JP2.3
  pour Top (isolate 0.305): 49.78,12.32 50.8,12.32 50.8,10.16 52.7,8.26 52.7,7.11 49.78,7.11
R02
  pour Top (isolate 0.305): 47.24,12.32 48.13,12.32 48.13,6.99 49.4,5.71 52.58,5.71 52.58,4.57 48.26,4.57 47.24,5.59
R03
  pour Top (isolate 0.305): 47.24,62.36 48.13,62.36 48.13,57.02 49.4,55.75 52.58,55.75 52.58,54.61 48.26,54.61 47.24,55.63
R04
  Top 1.27: JP30.2 JP20.1 53.34,52.58 54.61,53.85 54.61,56.39 53.34,57.66 JP20.3
  pour Top (isolate 0.305): 49.78,62.36 50.8,62.36 50.8,60.2 52.7,58.29 52.7,57.15 49.78,57.15
R_CTRL_1
  Top 0.203: U2.17 47.97,21.25 47.75,21.46 46.48,21.46 45.79,22.16 U1.11
R_CTRL_2
  Top 0.203: U1.12 46.59,22.24 46.86,21.97 48.01,21.97 48.62,21.36 U2.16
R_CTRL_3
  Top 0.203: U9.17 47.97,71.29 47.75,71.5 46.48,71.5 45.79,72.19 U7.11
R_CTRL_4
  Top 0.203: U7.12 46.59,72.28 46.86,72.01 48.01,72.01 48.62,71.4 U9.16
RESET  (via drill 0.51)
  Top 0.254: v60.96,20.32 63.5,20.32 64.77,21.59 64.77,22.86 66.04,24.13 72.39,24.13 73.66,25.4 73.66,31.75 72.39,33.02 JP5.5 | U1.29 v46.59,32.02 | v25.4,29.84 S4.3 | v53.34,20.95 53.34,19.7 R1.2 C7.1 53.33,17.77 53.09,17.53 v52.45,17.53
  5V 0.254: v52.45,17.53 53.72,17.53 54.1,17.91 58.55,17.91 v60.96,20.32
  Gnd 0.254: v53.34,20.95 53.34,26.67 52.07,27.94 52.07,30.48 51.69,30.86 47.75,30.86 v46.59,32.02 46.59,33.17 46.1,33.66 42.16,33.66 40.51,32 39.12,32 37.34,30.23 25.78,30.23 v25.4,29.84
RESET1  (via drill 0.51)
  Top 0.254: v60.96,70.36 63.5,70.36 64.77,71.63 64.77,72.9 66.04,74.17 72.39,74.17 73.66,75.44 73.66,81.79 72.39,83.06 JP27.5 | U7.29 v46.59,82.06 | v25.4,79.88 S8.3 | v53.34,70.99 53.34,69.74 R14.2 C14.1 53.33,67.8 53.09,67.56 v52.45,67.56
  5V 0.254: v52.45,67.56 53.72,67.56 54.1,67.94 58.55,67.94 v60.96,70.36
  Gnd 0.254: v53.34,70.99 53.34,76.71 52.07,77.98 52.07,80.52 51.69,80.9 47.75,80.9 v46.59,82.06 46.59,83.2 46.1,83.69 42.16,83.69 40.51,82.04 39.12,82.04 37.34,80.26 25.78,80.26 v25.4,79.88
RXI
  Top 0.254: R2.2 42.6,46.95 S3.4 44.16,46.2 43.81,45.85 43.18,45.85 42.67,45.34 42.67,42.67 40.64,40.64 40.64,39.88 44.07,36.45 45.34,36.45 45.79,36 U1.30
RXI1
  Top 0.254: R15.2 42.6,96.99 S7.4 44.16,96.23 43.81,95.89 43.18,95.89 42.67,95.38 42.67,92.71 40.64,90.68 40.64,89.92 44.07,86.49 45.34,86.49 45.79,86.04 U7.30
RXLED
  Top 0.254: U5.22 71.94,15.56 72.26,15.24 R5.2
RXLED1
  Top 0.254: U8.22 71.94,65.6 72.26,65.28 R17.2
SCK
  Top 0.254: U1.17 51.28,25.68 51.56,25.4 57.15,25.4 59.56,27.81 60.58,27.81 61.98,29.21 62.23,29.21 | 62.23,29.21 68.58,29.21 JP5.3 | R7.2 62.23,29.21
SCK1
  Top 0.254: U7.17 51.28,75.72 51.56,75.44 57.15,75.44 59.56,77.85 60.58,77.85 61.98,79.25 62.23,79.25 | 62.23,79.25 68.58,79.25 JP27.3 | R19.2 62.23,79.25
SENSOR_0/SW_TXO  (via drill 0.51)
  Top 0.254: U1.23 52.8,31.21 53.34,31.75 v53.34,38.86 53.34,41.4 52.79,41.95 S3.3 | v7.49,43.18 JP10.1
  5V 0.254: v53.34,38.86 31.62,38.86 31.5,38.99 29.34,38.99 27.43,36.83 11.05,36.83 7.49,40.39 v7.49,43.18
SENSOR_0/SW_TXO1  (via drill 0.51)
  Top 0.254: U7.23 52.8,81.25 53.34,81.79 v53.34,88.9 53.34,91.44 52.79,91.99 S7.3 | v7.49,93.22 JP23.1
  5V 0.254: v53.34,88.9 31.62,88.9 31.5,89.03 29.34,89.03 27.43,86.87 11.05,86.87 7.49,90.42 v7.49,93.22
SENSOR_1  (via drill 0.38, 0.51)
  Top 0.254: U7.25 49.79,84.7 49.66,84.84 v49.02,84.84 | v7.62,83.06 JP24.1
  5V 0.254: v49.02,84.84 45.47,84.84 45.21,84.58 8.38,84.58 7.62,83.82 v7.62,83.06
SENSOR_1/SW_RXI  (via drill 0.51)
  Top 0.254: U1.24 51.28,40.16 50.8,40.64 44.07,40.64 | S3.6 44.16,40.74 44.07,40.64 | 44.07,40.64 v41.91,40.64 | v17.78,43.18 JP10.2
  Gnd 0.254: v41.91,40.64 34.29,40.64 30.48,44.45 19.05,44.45 v17.78,43.18
SENSOR_1/SW_RXI1  (via drill 0.51)
  Top 0.254: U7.24 51.28,90.19 50.8,90.68 44.07,90.68 | S7.6 44.16,90.77 44.07,90.68 | 44.07,90.68 v41.91,90.68 | v17.78,93.22 JP23.2
  Gnd 0.254: v41.91,90.68 34.29,90.68 30.48,94.49 19.05,94.49 v17.78,93.22
SENSOR_2  (via drill 0.38, 0.51)
  Top 0.254: U1.25 49.79,34.66 49.66,34.8 v49.02,34.8 | v7.62,33.02 JP11.1
  5V 0.254: v49.02,34.8 45.47,34.8 45.21,34.54 8.38,34.54 7.62,33.78 v7.62,33.02
SENSOR_3  (via drill 0.38, 0.51)
  Top 0.254: U1.26 48.99,32.29 v49.53,31.75 | v17.78,33.02 JP11.2
  5V 0.254: v49.53,31.75 48.26,31.75 46.99,30.48 45.97,30.48 45.34,31.11 45.34,32.64 44.96,33.02 41.78,33.02 41.66,32.89 41.27,32.89 40.39,32 39.24,32 38.23,33.02 22.48,33.02 21.97,32.51 18.29,32.51 v17.78,33.02
SENSOR_4  (via drill 0.51)
  Top 0.254: U1.27 48.19,35.24 48.64,35.69 v50.29,35.69 | v54.36,35.69 54.36,43.31 55.5,44.45 60.96,44.45 63.5,46.99 77.47,46.99 78.74,45.72 JP12.1
  Bottom 0.254: v50.29,35.69 v54.36,35.69
SENSOR_5  (via drill 0.51)
  Top 0.254: U1.28 47.39,36.47 48.01,37.08 v50.29,37.08 | v55.88,37.08 55.88,43.05 56.39,43.56 61.47,43.56 64.26,46.35 76.83,46.35 v77.47,45.72 | v80.01,45.72 83.44,45.72 83.82,45.34 JP12.2
  Bottom 0.254: v50.29,37.08 v55.88,37.08 | v77.47,45.72 v80.01,45.72
SENSOR_6
  Top 0.254: U1.19 52.27,28.01 52.83,28.57 52.83,29.21 53.34,29.72 57.4,29.72 58.42,30.73 64.77,30.73 65.15,31.11 65.15,33.66 66.29,34.8 72.64,34.8 74.42,33.02 JP13.1
SENSOR_7
  Top 0.254: U1.22 53.27,30.41 55.24,32.38 57.78,32.38 58.29,31.88 63.88,31.88 64.26,32.26 64.26,33.91 65.91,35.56 73.03,35.56 74.42,34.16 83.44,34.16 83.82,33.78 JP13.2
SENSOR_8  (via drill 0.38, 0.51)
  Top 0.254: U7.26 48.99,82.33 v49.53,81.79 | v17.78,83.06 JP24.2
  5V 0.254: v49.53,81.79 48.26,81.79 46.99,80.52 45.97,80.52 45.34,81.15 45.34,82.68 44.96,83.06 41.78,83.06 41.66,82.93 41.27,82.93 40.39,82.04 39.24,82.04 38.23,83.06 22.48,83.06 21.97,82.55 18.29,82.55 v17.78,83.06
SENSOR_9  (via drill 0.51)
  Top 0.254: U7.27 48.19,85.27 48.64,85.72 v50.29,85.72 | v54.36,85.72 54.36,93.34 55.5,94.49 60.96,94.49 63.5,97.03 77.47,97.03 78.74,95.76 JP25.1
  Bottom 0.254: v50.29,85.72 v54.36,85.72
SENSOR_10  (via drill 0.51)
  Top 0.254: U7.28 47.39,86.51 48.01,87.12 v50.29,87.12 | v55.88,87.12 55.88,93.09 56.39,93.6 61.47,93.6 64.26,96.39 76.83,96.39 v77.47,95.76 | v80.01,95.76 83.44,95.76 83.82,95.38 JP25.2
  Bottom 0.254: v50.29,87.12 v55.88,87.12 | v77.47,95.76 v80.01,95.76
SENSOR_11
  Top 0.254: U7.19 52.27,78.05 52.83,78.61 52.83,79.25 53.34,79.76 57.4,79.76 58.42,80.77 64.77,80.77 65.15,81.15 65.15,83.69 66.29,84.84 72.64,84.84 74.42,83.06 JP26.1
SENSOR_12
  Top 0.254: U7.22 53.27,80.45 55.24,82.42 57.78,82.42 58.29,81.92 63.88,81.92 64.26,82.3 64.26,83.95 65.91,85.6 73.03,85.6 74.42,84.2 83.44,84.2 83.82,83.82 JP26.2
SERVO_1
  Top 0.254: U1.1 41.78,32.01 41.66,32.13 38.86,32.13 37.21,30.48 36.32,30.48 35.69,29.84 33.4,29.84 32.51,30.73 32.51,33.78 30.1,36.2 20.57,36.2 19.05,37.72 19.05,42.42 19.81,43.18 JP8.1
SERVO_2  (via drill 0.51)
  Top 0.254: U1.13 47.39,26.14 47.12,26.42 47.12,28.45 v47.88,29.21 | v43.18,35.56 36.83,35.56 35.18,33.91 33.53,33.91 33.02,34.42 33.02,41.4 31.24,43.18 JP8.2
  Bottom 0.254: v47.88,29.21 47.88,35.94 46.99,36.83 44.45,36.83 v43.18,35.56
SERVO_3  (via drill 0.51)
  Top 0.254: U1.14 48.19,26.6 v48.26,26.67 | v66.04,45.34 JP9.1
  Bottom 0.254: v48.26,26.67 60.2,26.67 61.09,27.56 61.09,42.8 61.47,43.18 63.88,43.18 v66.04,45.34
SERVO_4
  Top 0.254: U7.1 41.78,82.05 41.66,82.17 38.86,82.17 37.21,80.52 36.32,80.52 35.69,79.88 33.4,79.88 32.51,80.77 32.51,83.82 30.1,86.23 20.57,86.23 19.05,87.76 19.05,92.46 19.81,93.22 JP21.1
SERVO_4/MOSI  (via drill 0.51)
  Top 0.254: U1.15 48.99,24.04 49.4,23.62 50.67,23.62 v51.05,23.24 | JP9.2 71.12,44.7 v71.63,45.21
  Bottom 0.254: v51.05,23.24 57.28,23.24 59.05,25.02 62.36,25.02 62.87,25.53 62.87,28.57 64.77,30.48 | 64.77,30.48 JP5.4 | 64.77,30.48 64.77,34.29 66.04,35.56 71.12,35.56 72.39,36.83 72.39,44.45 v71.63,45.21
SERVO_4/MOSI1  (via drill 0.51)
  Top 0.254: U7.15 48.99,74.07 49.4,73.66 50.67,73.66 v51.05,73.28 | JP22.2 71.12,94.74 v71.63,95.25
  Bottom 0.254: v51.05,73.28 57.28,73.28 59.05,75.06 62.36,75.06 62.87,75.56 62.87,78.61 64.77,80.52 | 64.77,80.52 JP27.4 | 64.77,80.52 64.77,84.33 66.04,85.6 71.12,85.6 72.39,86.87 72.39,94.49 v71.63,95.25
SERVO_5  (via drill 0.51)
  Top 0.254: U7.13 47.39,76.18 47.12,76.45 47.12,78.49 v47.88,79.25 | v43.18,85.6 36.83,85.6 35.18,83.95 33.53,83.95 33.02,84.45 33.02,91.44 31.24,93.22 JP21.2
  Bottom 0.254: v47.88,79.25 47.88,85.98 46.99,86.87 44.45,86.87 v43.18,85.6
SERVO_6  (via drill 0.51)
  Top 0.254: U7.14 48.19,76.64 v48.26,76.71 | v66.04,95.38 JP22.1
  Bottom 0.254: v48.26,76.71 60.2,76.71 61.09,77.6 61.09,92.84 61.47,93.22 63.88,93.22 v66.04,95.38
TXLED
  Top 0.254: U5.23 71.97,16.21 72.26,16.51 R6.2
TXLED1
  Top 0.254: U8.23 71.97,66.25 72.26,66.55 R18.2
TXO  (via drill 0.51)
  Top 0.254: U1.31 44.99,35.27 v44.83,35.43 | S3.1 51.38,46.95 R3.2 51.42,45.96 v51.18,45.72
  Gnd 0.254: v44.83,35.43 44.83,39.75 45.72,40.64 49.53,40.64 50.8,41.91 50.8,45.34 v51.18,45.72
TXO1  (via drill 0.51)
  Top 0.254: U7.31 44.99,85.31 v44.83,85.47 | S7.1 51.38,96.99 R16.2 51.42,96 v51.18,95.76
  Gnd 0.254: v44.83,85.47 44.83,89.79 45.72,90.68 49.53,90.68 50.8,91.95 50.8,95.38 v51.18,95.76
V_BATT  (via drill 0.51)
  Top 0.254: U2.24 42.7,18.9 v42.16,18.92 | U2.14 U2.13 51.53,18.9 v51.69,18.92
  Top 0.305: Q1.5 15.54,23.84 v16,23.37 | Q1.6 15.82,23.18 v16,23.37 | R11.2 17.16,24.53 v16,23.37 | D1.A 4.2,23.25
  Top 1.016: 4.2,23.25 3.81,22.86 JP3.VIN0
  Top 1.27: D1.A v6.22,24.13
  Gnd 1.016: v6.22,24.13 6.22,20.45 7.62,19.05 16.51,19.05 | 16.51,19.05 21.59,24.13 29.34,24.13 34.54,18.92 v42.16,18.92 v51.69,18.92 | JP16.2 16.51,19.05
  Gnd 1.27: 16.51,19.05 16.51,22.86 v16,23.37
V_BATT1  (via drill 0.51)
  Top 0.254: U9.24 42.7,68.93 v42.16,68.96 | U9.14 U9.13 51.53,68.93 v51.69,68.96
  Top 0.305: Q2.5 15.54,73.87 v16,73.41 | Q2.6 15.82,73.22 v16,73.41 | R24.2 17.16,74.56 v16,73.41 | D7.A 4.2,73.29
  Top 1.016: 4.2,73.29 3.81,72.9 JP17.VIN0
  Top 1.27: D7.A v6.22,74.17
  Gnd 1.016: v6.22,74.17 6.22,70.48 7.62,69.09 16.51,69.09 | 16.51,69.09 21.59,74.17 29.34,74.17 34.54,68.96 v42.16,68.96 v51.69,68.96 | JP32.2 16.51,69.09
  Gnd 1.27: 16.51,69.09 16.51,72.9 v16,73.41
V_GATED  (via drill 0.51)
  Top 0.305: Q1.3 19.88,23.18 20.19,23.5
  Top 1.016: 20.19,23.5 v20.19,25.4 | JP8.3 v20.32,40.64 | v73.66,40.64 JP9.4 | JP9.3 v63.5,40.64 | JP8.4 v30.48,40.64
  5V 1.016: v20.32,40.64 20.32,46.74 21.46,47.88 30.48,47.88 | 30.48,47.88 45.34,47.88 45.97,48.51 63.5,48.51 | 63.5,48.51 73.41,48.51 74.3,47.62 74.3,40.64 v73.66,40.64 | v63.5,40.64 63.5,48.51 | v30.48,40.64 30.48,47.88
  Gnd 1.016: v20.19,25.4 20.19,31.75 19.68,32.26 19.68,36.07 19.05,36.7 19.05,39.37 v20.32,40.64
V_GATED1  (via drill 0.51)
  Top 0.305: Q2.3 19.88,73.22 20.19,73.53
  Top 1.016: 20.19,73.53 v20.19,75.44 | JP21.3 v20.32,90.68 | v73.66,90.68 JP22.4 | JP22.3 v63.5,90.68 | JP21.4 v30.48,90.68
  5V 1.016: v20.32,90.68 20.32,96.77 21.46,97.92 30.48,97.92 | 30.48,97.92 45.34,97.92 45.97,98.55 63.5,98.55 | 63.5,98.55 73.41,98.55 74.3,97.66 74.3,90.68 v73.66,90.68 | v63.5,90.68 63.5,98.55 | v30.48,90.68 30.48,97.92
  Gnd 1.016: v20.19,75.44 20.19,81.79 19.68,82.3 19.68,86.11 19.05,86.74 19.05,89.41 v20.32,90.68
V_IN  (via drill 0.51)
  Top 0.254: U3.1 16.54,2.57 v16.51,2.54 | v31.24,2.54 31.13,2.65 R10.2 31.13,12.97 31.75,13.59 R9.2
  Top 1.016: D2.C 84.21,2.93 v83.82,2.54 | D1.C v10.16,24.13
  5V 1.016: v83.82,2.54 57.15,2.54 52.07,7.62 41.91,7.62 36.83,2.54 v31.24,2.54 v16.51,2.54 12.7,2.54 11.43,3.81 11.43,22.86 v10.16,24.13
V_IN1  (via drill 0.51)
  Top 0.254: U10.1 16.54,52.61 v16.51,52.58 | v31.24,52.58 31.13,52.69 R22.2 31.13,63.01 31.75,63.63 R21.2
  Top 1.016: D8.C 84.21,52.97 v83.82,52.58 | D7.C v10.16,74.17
  5V 1.016: v83.82,52.58 57.15,52.58 52.07,57.66 41.91,57.66 36.83,52.58 v31.24,52.58 v16.51,52.58 12.7,52.58 11.43,53.85 11.43,72.9 v10.16,74.17
V_USB  (via drill 0.51)
  Top 0.254: 76.96,14.27 U5.20 70.02,14.27 69.72,13.97 67.06,13.97 66.67,14.35 66.67,17.39 66.8,17.52 | 76.96,14.27 79.29,14.27 v79.88,14.86 | JP4.VBUS 84.76,14.91 v83.82,13.97 | U5.4 66.8,17.52 | 66.8,17.52 67.55,17.52 67.93,17.89 C5.1 | 76.96,14.27 76.95,14.28 D3.A D5.A
  Top 0.813: v83.82,13.97 83.82,10.03 85.09,8.76 87.76,8.76 88.51,8.01 D2.A
  Gnd 0.254: v79.88,14.86 82.93,14.86 v83.82,13.97
V_USB1  (via drill 0.51)
  Top 0.254: 76.96,64.3 U8.20 70.02,64.3 69.72,64.01 67.06,64.01 66.67,64.39 66.67,67.43 66.8,67.55 | 76.96,64.3 79.29,64.3 v79.88,64.9 | JP18.VBUS 84.76,64.95 v83.82,64.01 | U8.4 66.8,67.55 | 66.8,67.55 67.55,67.55 67.93,67.93 C12.1 | 76.96,64.3 76.95,64.31 D9.A D11.A
  Top 0.813: v83.82,64.01 83.82,60.07 85.09,58.8 87.76,58.8 88.51,58.05 D8.A
  Gnd 0.254: v79.88,64.9 82.93,64.9 v83.82,64.01
XBEE_DIO1  (via drill 0.51)
  Top 0.254: 57.91,66.17 57.91,65.53 56.39,64.01 U12.2 | 57.91,66.17 57.91,70.74 v57.66,70.99 | v57.66,78.61 58.29,79.25 59.46,79.25 MOD2.17 | R25.1 57.77,66.03 57.91,66.17
  5V 0.254: v57.66,70.99 57.66,72.01 58.04,72.39 58.04,78.23 v57.66,78.61
XBEE_DIO3  (via drill 0.51)
  Top 0.254: 57.91,16.13 57.91,15.49 56.39,13.97 U6.2 | 57.91,16.13 57.91,20.7 v57.66,20.95 | v57.66,28.57 58.29,29.21 59.46,29.21 MOD1.17 | R12.1 57.77,15.99 57.91,16.13
  5V 0.254: v57.66,20.95 57.66,21.97 58.04,22.35 58.04,28.19 v57.66,28.57
XBEE_RXI  (via drill 0.38, 0.51)
  Top 0.254: MOD1.3 36.32,31.24 v36.83,31.75 | v53.34,44.45 53.34,43.43 53.07,43.16 R4.1
  Bottom 0.254: v53.34,44.45 53.34,40.64 52.2,39.37 43.56,39.37 41.78,37.59 41.78,33.66 39.88,31.75 v36.83,31.75
XBEE_RXI1  (via drill 0.38, 0.51)
  Top 0.254: MOD2.3 36.32,81.28 v36.83,81.79 | v53.34,94.49 53.34,93.47 53.07,93.2 R23.1
  Bottom 0.254: v53.34,94.49 53.34,90.68 52.2,89.41 43.56,89.41 41.78,87.63 41.78,83.69 39.88,81.79 v36.83,81.79
XBEE_TXO  (via drill 0.38, 0.51)
  Top 0.254: S3.5 44.16,43.4 v43.94,43.18 | MOD1.2 40.1,33.24 v40.13,33.27
  Bottom 0.254: v43.94,43.18 40.77,43.18 40.64,43.05 40.64,33.78 v40.13,33.27
XBEE_TXO1  (via drill 0.38, 0.51)
  Top 0.254: S7.5 44.16,93.44 v43.94,93.22 | MOD2.2 40.1,83.28 v40.13,83.31
  Bottom 0.254: v43.94,93.22 40.77,93.22 40.64,93.09 40.64,83.82 v40.13,83.31

## Text on the board
Bottom: v11 | v11
tPlace: XBEE HW SERIAL | SENSOR | SERVO | SERVO | SENSOR | A0 | A1 | 3 | 9 | POWER | 10 | 11 | A4 | A5 | 5V | 5V | POW | POW | POW | POW | 5V | 5V | GND | 5V | 5V | GND | XBEE SW SERIAL | GND | GND | GND | GND | GND | GND | GND | GND | SENSOR | SENSOR | A2 | A3 | A6 | A7 | 5V | 5V | 5V | 5V | GND | GND | RESET | GND | GND | MOTOR | USER LED | RUN | STOP | V_IN / 6-9V | POWER | TX | RX | ON | + | OFF | LEFT / MOTOR | RIGHT / MOTOR | - | RED | RED | BLACK | BLACK | RedBot | XBEE HW SERIAL | SENSOR | SERVO | SERVO | SENSOR | A0 | A1 | 3 | 9 | POWER | 10 | 11 | A4 | A5 | 5V | 5V | POW | POW | POW | POW | 5V | 5V | GND | 5V | 5V | GND | XBEE SW SERIAL | GND | GND | GND | GND | GND | GND | GND | GND | SENSOR | SENSOR | A2 | A3 | A6 | A7 | 5V | 5V | 5V | 5V | GND | GND | RESET | GND | GND | MOTOR | USER LED | RUN | STOP | V_IN / 6-9V | POWER | TX | RX | ON | + | OFF | LEFT / MOTOR | RIGHT / MOTOR | - | RED | RED | BLACK | BLACK | RedBot
bPlace: sparkfun.com/redbot | sparkfun.com/redbot